# Altium PCB PCAD4.PcbDoc
Units mil, origin at the board's own origin, x right, y up, seen from the top; angles counter-clockwise.
Board outline 7300 x 3000 mil, 2 copper layers (Top Layer, Top, Bottom Layer, Bottom); 15 components, 10 nets, 71 pads, 0 vias.
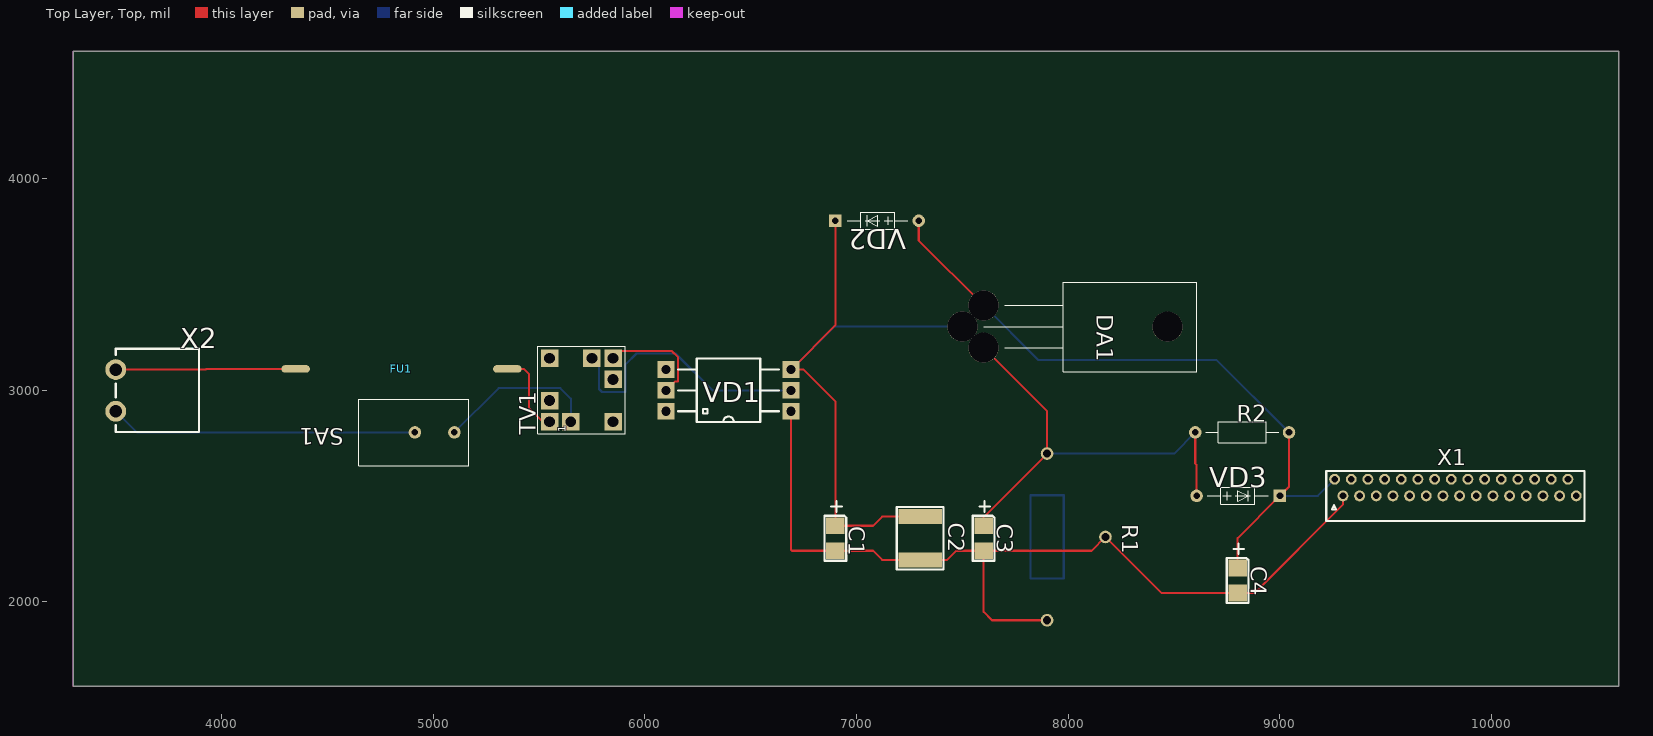
[diagram p0: Top Layer, Top view]
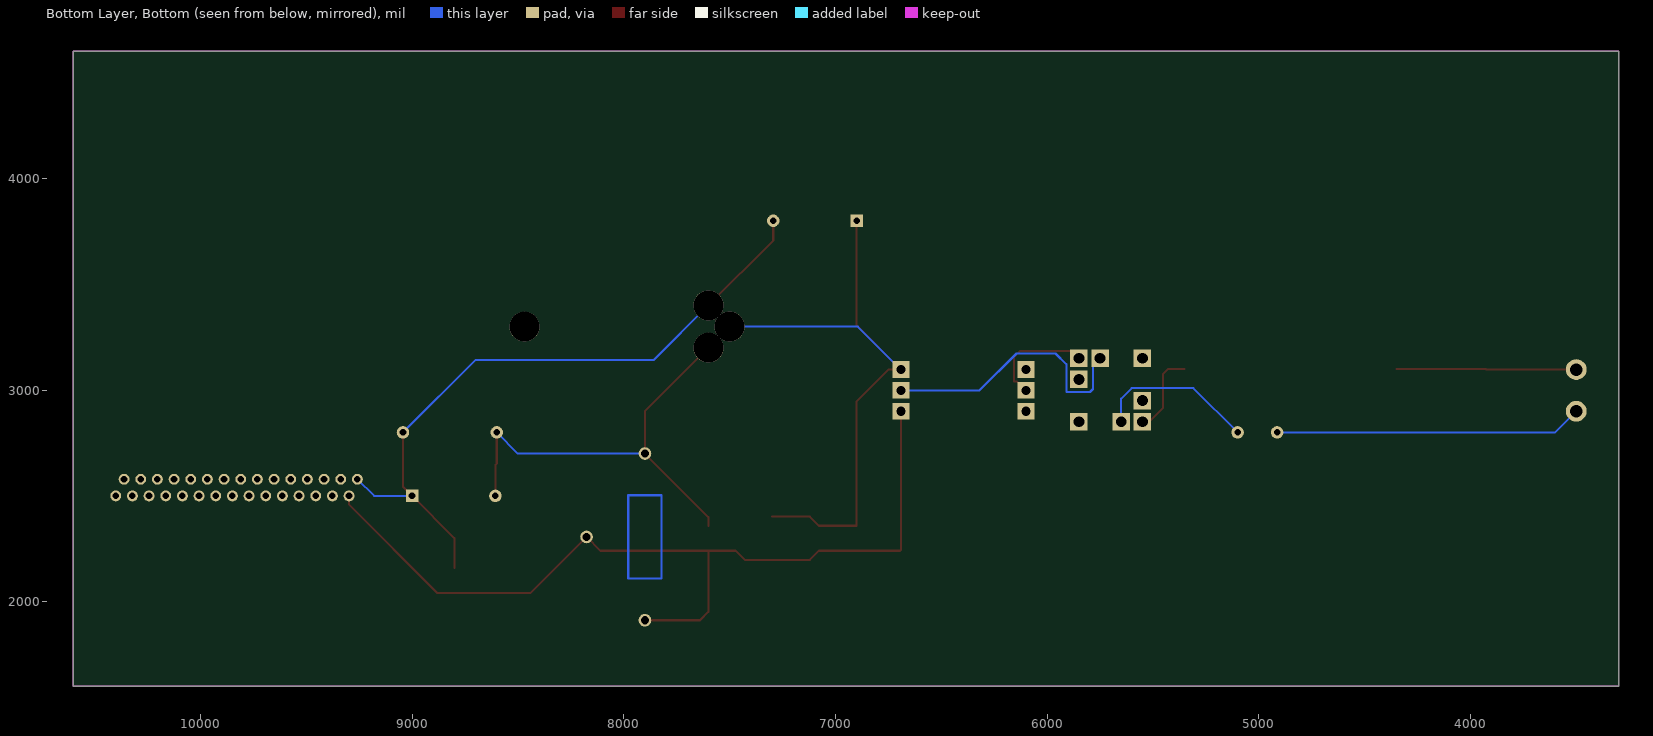
[diagram p1: Bottom Layer, Bottom view, seen from below]

## Layer stack, top to bottom
Top Solder, Top Mask: solder mask 0.4, Solder Resist, Dk 3.5
Top Layer, Top: signal copper 1.4
Dielectric 1: dielectric 12.6, FR-4, Dk 4.8
Bottom Layer, Bottom: signal copper 1.4
Bottom Solder, Bot Mask: solder mask 0.4, Solder Resist, Dk 3.5

## Board outline
3300,1600 10600,1600 10600,4600 3300,4600

## Design rules (kind name [scope] priority, off if disabled: settings)
Clearance [All] p1: gap=10 ignorepadtopadclearanceinfootprint=FALSE except(0: Arc-Hole Track-Hole SMDPad-Hole THPad-Hole Via-Hole Fill-Hole Poly-Hole Region-Hole Text-Hole; 12: Arc-Arc Arc-Track Arc-THPad Arc-Via Track-Track Track-THPad Track-Via THPad-THPad THPad-Via Via-Via)
PlaneClearance [All] p1: clearance=10
PolygonConnect [All] p1: connectstyle=Relief reliefconductorwidth=10 reliefentries=4 polygonreliefangle="90 Angle" airgapwidth=10
RoutingVias [All] p1: holewidth=28 width=50 viastyle="Through Hole" minholewidth=28 minwidth=50 maxholewidth=28 maxwidth=50
SolderMaskExpansion [All] p1: expansion=4 istentingtop=FALSE
Width [All] p1: maxlimit=10 minlimit=10 preferedwidth=10
29 further rules are at their usual default settings.

## Components (designator, comment, footprint, x,y, rotation, side; value= is the part's Value field where it differs from the comment)
C1 "" CE3528-B 6900,2300 r270 top
C2 "" CC2220 7300,2300 r270 top
C3 "" CE3528-B 7600,2300 r270 top
C4 "" CE3528-B 8800,2100 r270 top
DA1 "" TO-220-KT-28-2 7600,3400 r270 top
FU1 "0,25" 685521_008 4300,3100 r0 top
R1 "" R2 7900,2700 r270 top
R2 "240" C2-33H-0.125W 8600,2800 r0 top
SA1 "" MTS-101 5100,2800 r180 top
TV1 "" TRS-3-1 5700,3000 r90 top
VD1 "" KC407 6100,2900 r0 top
VD2 "" КД521(522)_КД522Б(Primary) 6900,3800 r180 top
VD3 "" КД521(522)_КД522Б(Primary) 9000,2500 r0 top
X1 "" 30FMN 10400,2500 r0 top
X2 "" 2XR 3500,2900 r0 top

## Footprints (in the part's own frame and the unit in brackets; to place one, negate y for a bottom-side part, rotate by r counter-clockwise, add the part's x,y. Pads: shape width x height; smd on the part's side, far side on the other; paste and mask are expansions set on the pad)
2XR [mm]
  round 2.5 hole 1.5: 1(0,0) 2(0,5)
  silkscreen extent 0,-2.5 10,7.5
30FMN [mm]
  round 1.3 hole 0.8: 1(-29,2) 2(-28,0) 3(-27,2) 4(-26,0) 5(-25,2) 6(-24,0) 7(-23,2) 8(-22,0) 9(-21,2) 10(-20,0) 11(-19,2) 12(-18,0) 13(-17,2) 14(-16,0) 15(-15,2) 16(-14,0) 17(-13,2) 18(-12,0) 19(-11,2) 20(-10,0) 21(-9,2) 22(-8,0) 23(-7,2) 24(-6,0) 25(-5,2) 26(-4,0) 27(-3,2) 28(-2,0) 29(-1,2) 30(0,0)
  silkscreen extent -30,-3 1,3
685521_008 [mil]
  oval 135x35 smd: 1(50,0) 2(1050,0)
C2-33H-0.125W [mm]
  round 1.5 hole 0.8: 1(0,0) 2(11.25,0)
  silkscreen extent 1.25,-1.25 10,1.25
CC2220 [mm]
  rect 1.8x5.2 smd: 1(-2.6,0) 2(2.6,0)
  silkscreen extent -3.75,-2.8 3.75,2.8
CE3528-B [mm]
  rect 2x2.2 smd: 1(-1.5,0) 2(1.5,0)
  silkscreen extent -4.44,-1.3 2.7,1.3
KC407 [mm]
  rect 2x2 hole 1.1: 1(0,0) 2(0,2.5) 3(0,5) 4(15,5) 5(15,2.5) 6(15,0)
  silkscreen extent 1.44,-1.27 13.57,6.35
MTS-101 [mm]
  round 1.5 hole 0.8: 1(0,0) 2(4.75,0)
  silkscreen extent -1.75,-4 11.5,4
R2 [mil]
  round 60 hole 38: 1(0,0) 2(787.4,0) 3(393.7,275.59)
  Bottom Layer, Bottom lines w9.84: 590.55,-78.74 590.55,78.74 196.85,78.74 196.85,-78.74 590.55,-78.74
TO-220-KT-28-2 [mm]
  round 3.6 hole 3.6 unplated: 1(0,0) 2(2.54,-2.54) 3(5.08,0) 4(2.55,22.07)
  silkscreen extent -2.8,0 7.95,25.57
TRS-3-1 [mm]
  rect 2.1x2.1 hole 1.3: 1(-3.81,3.81) 2(-3.81,1.27) 3(1.27,-3.81) 4(3.81,-3.81) 5(3.81,-1.27) 6(-1.27,3.81) 7(3.81,3.81) 8(-3.81,-3.81)
  silkscreen extent -5.25,-5.25 5.25,5.25
КД521(522)_КД522Б(Primary) [mm]
  round 1.5 hole 0.8: 1(-10,0)
  rect 1.5x1.5 hole 0.8: 2(0,0)
  silkscreen extent -8.71,-1.02 -1.4,1.02

## Nets (pads, with @x,y where several pads share a name; then routed paths per layer and width w, separated by ;. In a path a pad name is that pad's centre, name@x,y a point inside that pad or via, vN(x,y) a via of type N, cw(c..) or ccw(c..) an arc to the next point about the centre after c; other vN are vias at no path point)
NET00000: FU1.2 TV1.1 | length 397.3
  Top Layer, Top w10: FU1.2 5428,3100 5453,3075 5453,2915 5518,2850 TV1.1
NET00001: SA1.1 TV1.2 | length 766.3
  Bottom Layer, Bottom w10: SA1.1 5309,3009 5600,3009 5650,2959 TV1.2
NET00002: TV1.4 VD1.2 | length 522.3
  Top Layer, Top w10: TV1.4 5884,3184 6128,3184 6157,3155 6157,3040 6141.57,3040 VD1.2
NET00003: TV1.5 VD1.5 | length 1296.5
  Bottom Layer, Bottom w10: TV1.5 5783,3117 5783,3005 5797,2991 5909,2991 5909,3122 5960,3173 6144.43,3173 6319,2998.43 VD1.5
NET00004: C1.2 C2.2 C3.2 C4.2 R1.2 R1.3 VD1.6 X1.2 | length 4255.7
  Top Layer, Top w10: VD1.6 6690.55,2245.39 6695,2240.94 C1.2 7078,2240.94 7121.31,2197.64 C2.2 7428,2197.64 7471.31,2240.94 C3.2 ; R1.2 7640,1912.6 7600,1952.6 C3.2 ; X1.2 9297.64,2458.58 8880,2040.94 C4.2 8440.94,2040.94 R1.3 8110.24,2240.94 C3.2
NET00005: C1.1 C2.1 DA1.2 VD1.4 VD2.2 | length 2960.8
  Top Layer, Top w10: VD2.2 6900,3306.3 VD1.4 6750,3096.85 6900,2946.85 C1.1 7078,2359.06 7121.31,2402.36 C2.1
  Bottom Layer, Bottom w10: VD1.4 6893.7,3300 DA1.2
NET00006: C3.1 DA1.3 R1.1 R2.1 VD3.1 | length 2133.5
  Top Layer, Top w10: C3.1 7600,2400 R1.1 7900,2900 DA1.3 ; R2.1 8600,2652.3 8606.3,2646 VD3.1
  Bottom Layer, Bottom w10: R1.1 8500,2700 R2.1
NET00008: C4.1 DA1.1 R2.2 VD2.1 VD3.2 X1.1 | length 3250.8
  Top Layer, Top w10: VD2.1 7293.7,3706.3 DA1.1 ; C4.1 8800,2300 VD3.2 9042.91,2542.91 R2.2
  Bottom Layer, Bottom w10: DA1.1 7857,3143 8699.91,3143 R2.2 ; VD3.2 9179.53,2500 X1.1
NET00009: FU1.1 X2.2 | length 851.3
  Top Layer, Top w10: X2.2 3925,3096.85 3928.15,3100 FU1.1
NET00010: SA1.2 X2.1 | length 1454.4
  Bottom Layer, Bottom w10: X2.1 3600,2800 SA1.2
pads on no net: DA1.4 TV1.3 TV1.6 TV1.7 TV1.8 VD1.1 VD1.3 X1.3 X1.4 X1.5 X1.6 X1.7 X1.8 X1.9 X1.10 X1.11 X1.12 X1.13 X1.14 X1.15 X1.16 X1.17 X1.18 X1.19 X1.20 X1.21 X1.22 X1.23 X1.24 X1.25 X1.26 X1.27 X1.28 X1.29 X1.30

## Keep-outs
Keep-Out Layer, Board:
  the board outline again, w5

## Text inside footprints (layer, text, board x,y; h text height)
FU1: Mechanical 4, MissingLayer26 "27" at 4786.25,3085 h62.5; Mechanical 4, MissingLayer26 "21" at 4896.25,3150 h62.5
TV1: Top Overlay, Top Silk "1" at 5625,2800 h36.91 r90